# Altium PCB Macropad V2.PcbDoc (part 1 of 2)
Units mil, origin at the board's own origin, x right, y up, seen from the top; angles counter-clockwise.
Board outline 4300 x 6330 mil, 2 copper layers (Top Layer, Bottom Layer); 118 components, 85 nets, 479 pads, 180 vias.
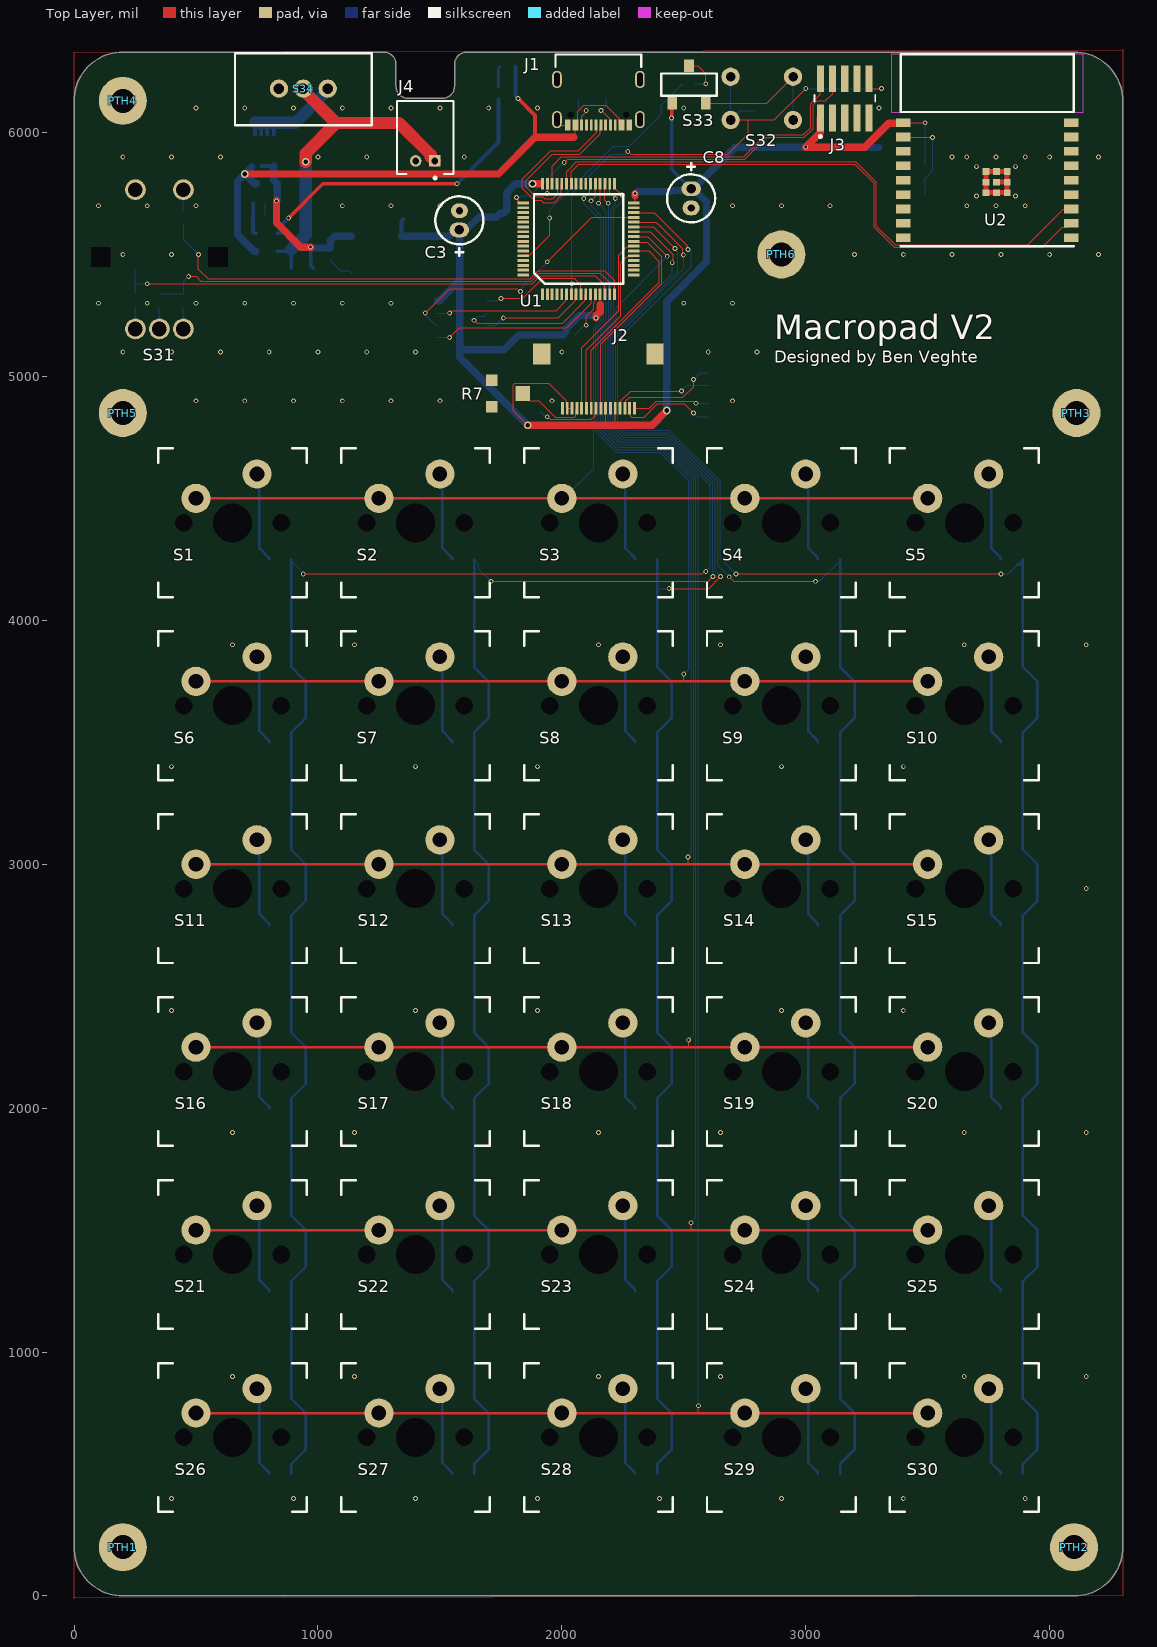
[diagram p0: Top Layer view]
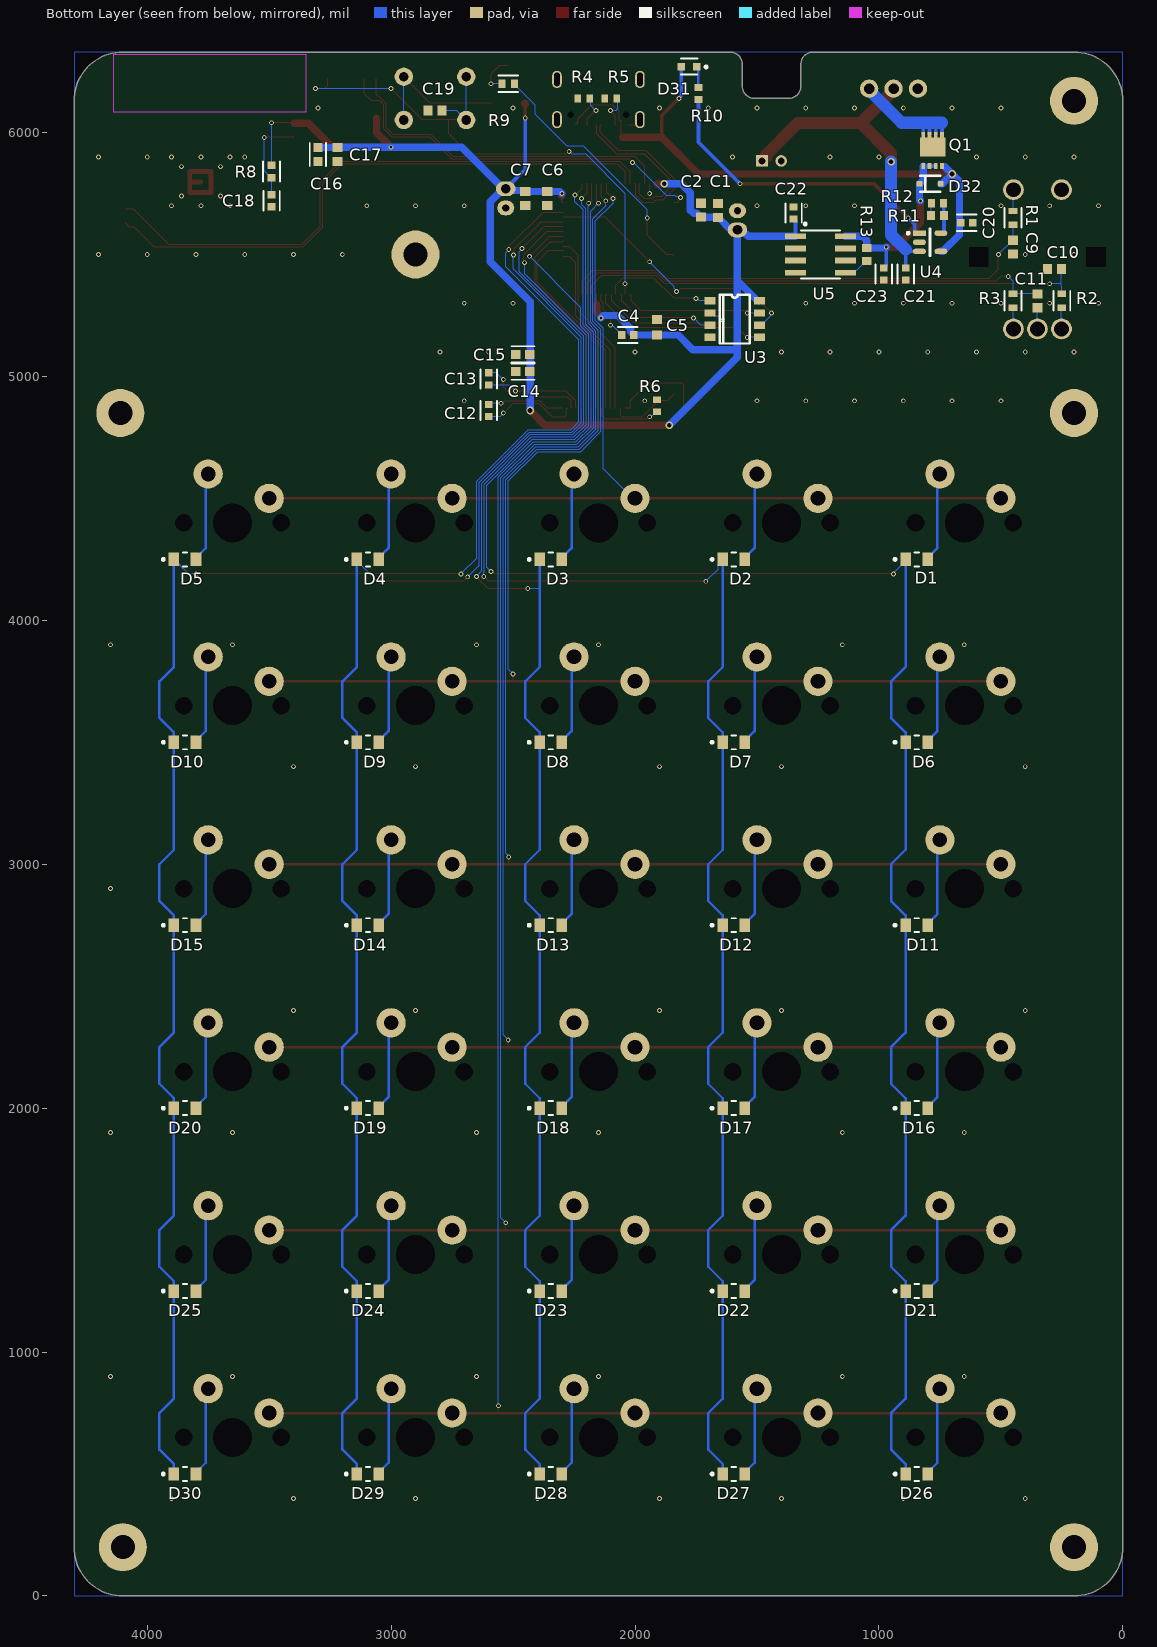
[diagram p1: Bottom Layer view, seen from below]
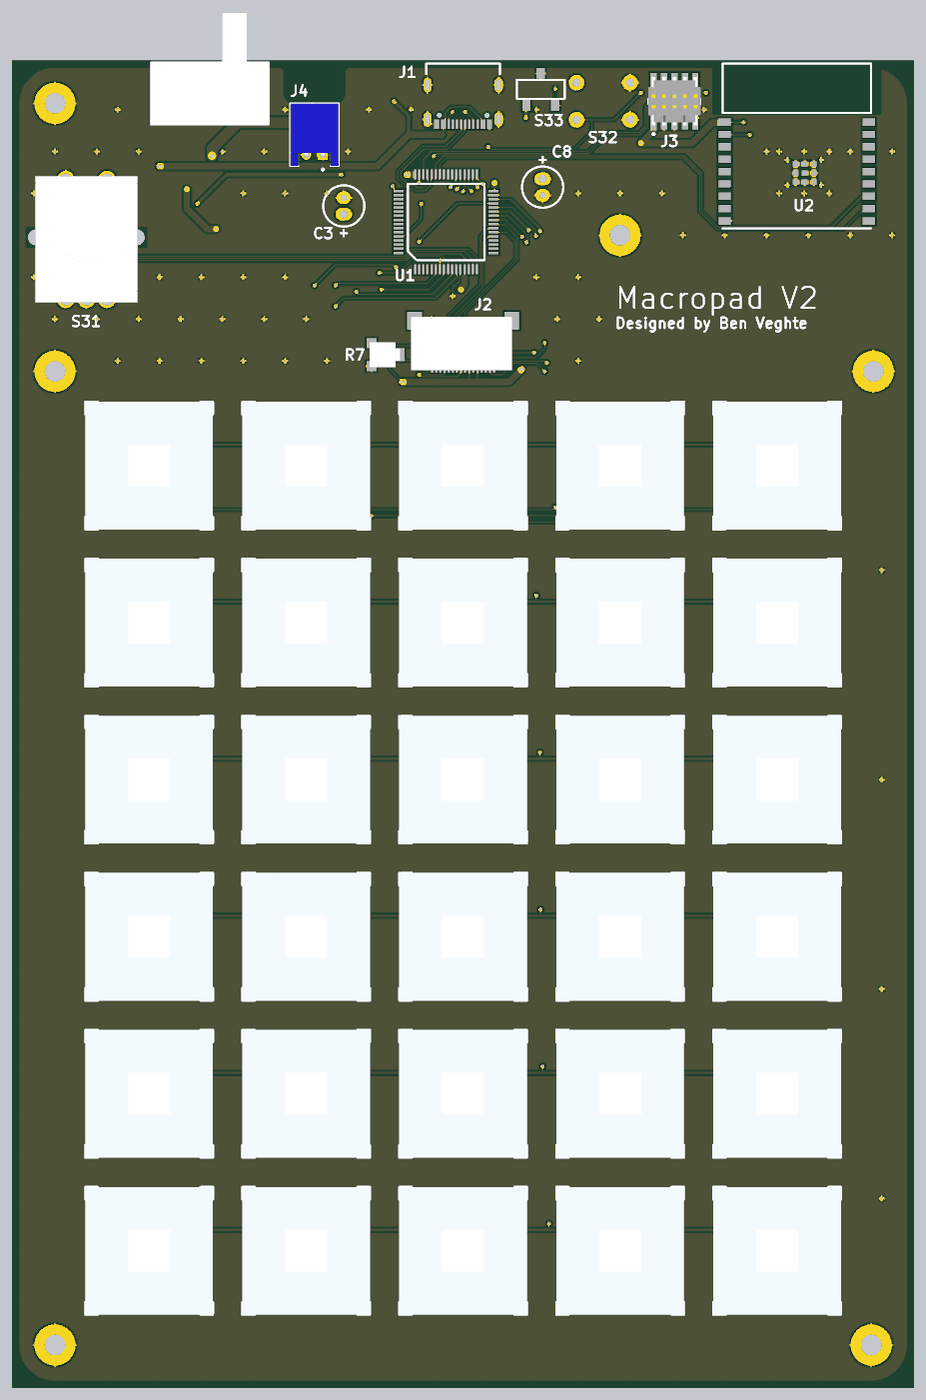
[diagram p3: 3D render of the assembled board from above, using the file's embedded part models]
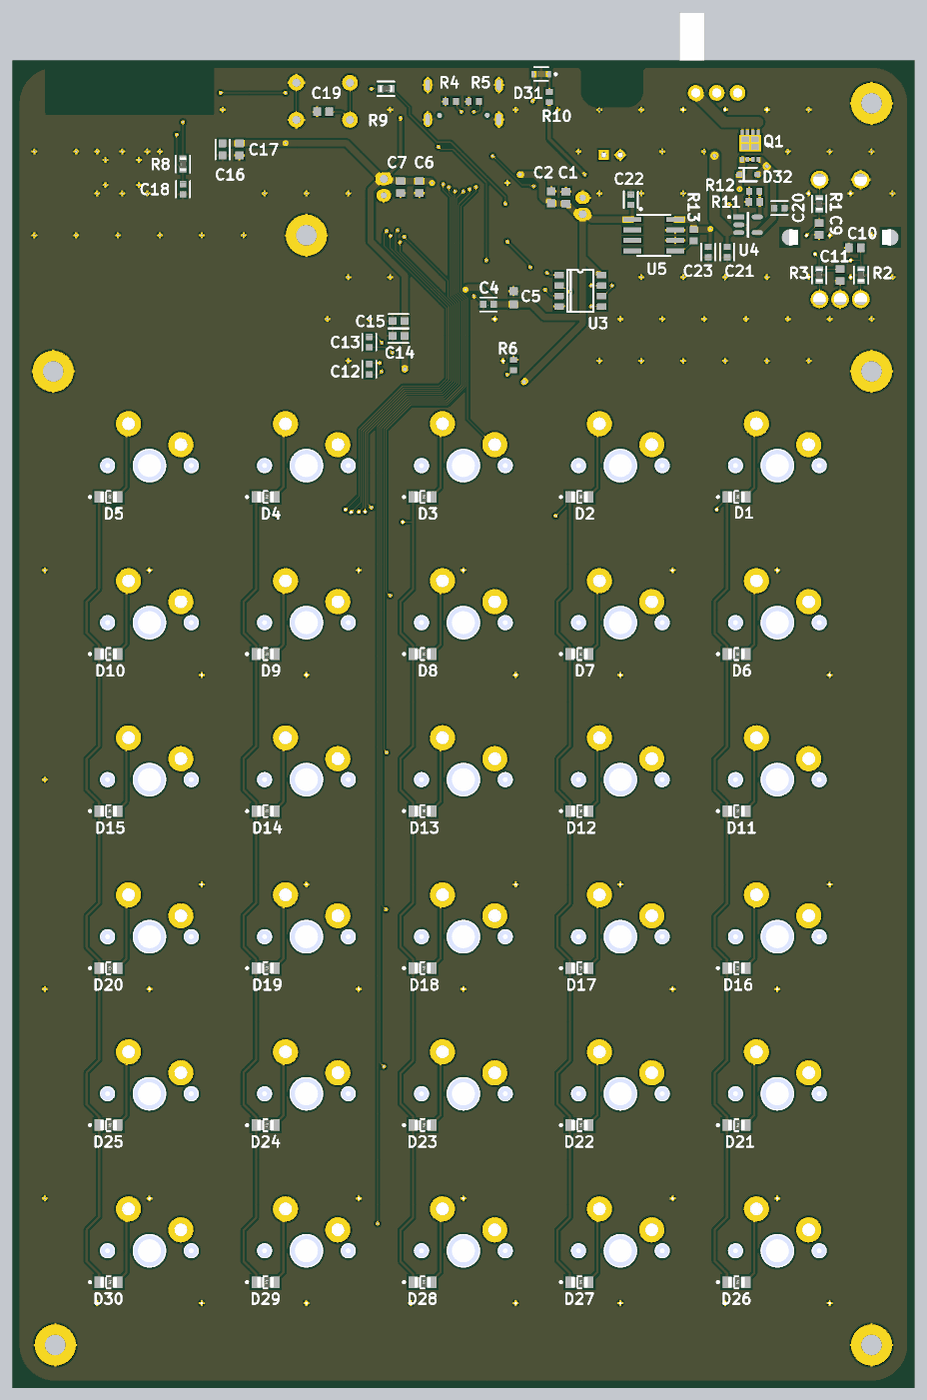
[diagram p4: 3D render of the assembled board from below, using the file's embedded part models]

## Layer stack, top to bottom
Top Solder: solder mask 0.4, Solder Resist, Dk 3.5
Top Layer: signal copper 1.4
Dielectric 1: dielectric 12.6, FR-4, Dk 4.8
Bottom Layer: signal copper 1.4
Bottom Solder: solder mask 0.4, Solder Resist, Dk 3.5

## Board outline
200,0 cw(c200,200) 0,200 0,6130 cw(c200,6130) 200,6330 1270,6330 cw(c1270,6280) 1320,6280 1320,6190 ccw(c1370,6190) 1370,6140 1510,6140 ccw(c1510,6190) 1560,6190 1560,6280 cw(c1610,6280) 1610,6330 4100,6330 cw(c4100,6130) 4300,6130 4300,200 cw(c4100,200) 4100,0

## Design rules (kind name [scope] priority, off if disabled: settings)
BoardOutlineClearance [All] p1: gap=29.53 ignorepadtopadclearanceinfootprint=FALSE
Clearance [All] p1: gap=10 ignorepadtopadclearanceinfootprint=TRUE except(0: Arc-Hole Track-Hole SMDPad-Hole THPad-Hole Via-Hole Fill-Hole Poly-Hole Region-Hole Text-Hole; 5: Arc-Arc Arc-Track Track-Track SMDPad-SMDPad; 7.87: Arc-SMDPad Track-SMDPad; 12.99: Arc-THPad Track-THPad; 19.68: THPad-THPad)
DiffPairsRouting [All] p1: maxlimit=10 minlimit=10 mostfreqgap=10 toplayer_minwidth=5 toplayer_maxwidth=15 toplayer_prefwidth=5 bottomlayer_minwidth=5 bottomlayer_maxwidth=15 bottomlayer_prefwidth=5 maxuncoupledlength=500
HoleSize [All] p1: absolutevalues=TRUE maxlimit=248.03 minlimit=7.87 maxpercent=80.000 minpercent=20.000
PolygonConnect [All] p1: connectstyle=Relief reliefconductorwidth=10 reliefentries=4 polygonreliefangle="90 Angle" airgapwidth=10
RoomDefinition "Rotary Encoder" [InComponentClass('Rotary Encoder')] p1: confinementstyle=ConfineIn formatcopy=TRUE lockcomponents=FALSE outline -1100,-1100 900,-1100 900,-100 -1100,-100
RoomDefinition "Reset Bootloader and Mounting" [InComponentClass('Reset Bootloader and Mounting')] p2: confinementstyle=ConfineIn formatcopy=TRUE lockcomponents=FALSE outline -1100,-1100 900,-1100 900,-100 -1100,-100
RoomDefinition OLED [InComponentClass('OLED')] p3: confinementstyle=ConfineIn formatcopy=TRUE lockcomponents=FALSE outline -1100,-1100 900,-1100 900,-100 -1100,-100
RoomDefinition Microcontroller [InComponentClass('Microcontroller')] p4: confinementstyle=ConfineIn formatcopy=TRUE lockcomponents=FALSE outline -1100,-1100 900,-1100 900,-100 -1100,-100
RoomDefinition "Keyboard Matrix" [InComponentClass('Keyboard Matrix')] p5: confinementstyle=ConfineIn formatcopy=TRUE lockcomponents=FALSE outline -1100,-1100 900,-1100 900,-100 -1100,-100
RoomDefinition "Flash Memory" [InComponentClass('Flash Memory')] p6: confinementstyle=ConfineIn formatcopy=TRUE lockcomponents=FALSE outline -1100,-1100 900,-1100 900,-100 -1100,-100
RoomDefinition Bluetooth [InComponentClass('Bluetooth')] p7: confinementstyle=ConfineIn formatcopy=TRUE lockcomponents=FALSE outline -1100,-1100 900,-1100 900,-100 -1100,-100
RoomDefinition "Battery Load Share V2" [InComponentClass('Battery Load Share V2')] p8: confinementstyle=ConfineIn formatcopy=TRUE lockcomponents=FALSE outline -1100,-1100 900,-1100 900,-100 -1100,-100
RoomDefinition "USB C Port" [InComponentClass('USB C Port')] p9: confinementstyle=ConfineIn formatcopy=TRUE lockcomponents=FALSE outline -1100,-1100 900,-1100 900,-100 -1100,-100
RoutingVias [All] p1: holewidth=11.81 width=19.68 viastyle="Through Hole" minholewidth=11.81 minwidth=19.68 maxholewidth=248.03 maxwidth=590.55
SolderMaskExpansion [All] p1: expansion=4 istentingtop=FALSE
Width [All] p1: maxlimit=600 minlimit=5 preferedwidth=5
28 further rules are at their usual default settings.

## Classes and differential pairs
component class "USB C Port": J1 R4 R5
component class "Rotary Encoder": C9 C10 C11 R1 R2 R3 S31
component class "Reset Bootloader and Mounting": C19 J3 PTH1 PTH2 PTH3 PTH4 PTH5 PTH6 R9 S32 S33
component class OLED: C12 C13 C14 C15 J2 R6 R7
component class Microcontroller: C1 C2 C3 C4 C5 C6 C7 C8 U1
component class "Keyboard Matrix": D1 D2 D3 D4 D5 D6 D7 D8 D9 D10 D11 D12 D13 D14 D15 D16 D17 D18 D19 D20 D21 D22 D23 D24 D25 D26 D27 D28 D29 D30 S1 S2 S3 S4 S5 S6 S7 S8 S9 S10 S11 S12 S13 S14 S15 S16 S17 S18 S19 S20 S21 S22 S23 S24 S25 S26 S27 S28 S29 S30
component class "Flash Memory": U3
component class Bluetooth: C16 C17 C18 R8 U2
component class "Battery Load Share V2": C20 C21 C22 C23 D31 D32 J4 Q1 R10 R11 R12 R13 S34 U4 U5
differential pair USB: +USB_P -USB_N

## Components (designator, comment, footprint, x,y, rotation, side; value= is the part's Value field where it differs from the comment)
C1 "CL10B104KB8NNNC" SAMS-C0603-2_M 1660,5680 r270 bottom
C2 "CL10B104KB8NNNC" SAMS-C0603-2_M 1730,5681.46 r270 bottom
C3 "860010572001" 860010572001 1580,5640 r90 top
C4 "CL10A105KA8NNNC" FP-CL10-IPC_C 2030,5170 r0 bottom
C5 "CL10B103KB8NNNC" CL10B103KB8NNNC 1910,5201.5 r270 bottom
C6 "CL10B104KB8NNNC" SAMS-C0603-2_M 2360,5730 r90 bottom
C7 "CL10B104KB8NNNC" SAMS-C0603-2_M 2450,5730 r90 bottom
C8 "860010572001" 860010572001 2530,5730 r270 top
C9 "CL10B104KB8NNNC" SAMS-C0603-2_M 450.16,5530 r270 bottom
C10 "CL10B104KB8NNNC" SAMS-C0603-2_M 280.16,5440 r0 bottom
C11 "CL10B104KB8NNNC" SAMS-C0603-2_M 350.16,5310 r90 bottom
C12 "CL10A105KA8NNNC" FP-CL10-IPC_C 2600,4860 r270 bottom
C13 "CL10A105KA8NNNC" FP-CL10-IPC_C 2600,4990 r270 bottom
C14 "CL10A106KP8NNND" FP-CL10-IPC_B 2460,5020 r0 bottom
C15 "CL10A106KP8NNND" FP-CL10-IPC_B 2460,5090 r0 bottom
C16 "CL10A106KP8NNND" FP-CL10-IPC_B 3300,5910 r90 bottom
C17 "CL10B104KB8NNNC" SAMS-C0603-2_M 3220,5910 r90 bottom
C18 "CL10A105KA8NNNC" FP-CL10-IPC_C 3490,5720 r90 bottom
C19 "CL10B104KB8NNNC" SAMS-C0603-2_M 2820,6090 r0 bottom
C20 "CL10A475KP8NNND" FP-CL10-IPC_C 640,5630 r0 bottom
C21 "CL10A475KP8NNND" FP-CL10-IPC_C 890,5420 r90 bottom
C22 "CL10A475KP8NNND" FP-CL10-IPC_C 1350,5670 r90 bottom
C23 "CL10A475KP8NNND" FP-CL10-IPC_C 980,5420 r270 bottom
D1 "TS4148 RYG" FP-TS4148_RYG-MFG 845.28,4250 r180 bottom locked
D2 "TS4148 RYG" FP-TS4148_RYG-MFG 1595.28,4250 r180 bottom locked
D3 "TS4148 RYG" FP-TS4148_RYG-MFG 2345.28,4250 r180 bottom locked
D4 "TS4148 RYG" FP-TS4148_RYG-MFG 3095.28,4250 r180 bottom locked
D5 "TS4148 RYG" FP-TS4148_RYG-MFG 3845.28,4250 r180 bottom locked
D6 "TS4148 RYG" FP-TS4148_RYG-MFG 845.28,3500 r180 bottom locked
D7 "TS4148 RYG" FP-TS4148_RYG-MFG 1595.28,3500 r180 bottom locked
D8 "TS4148 RYG" FP-TS4148_RYG-MFG 2345.28,3500 r180 bottom locked
D9 "TS4148 RYG" FP-TS4148_RYG-MFG 3095.28,3500 r180 bottom locked
D10 "TS4148 RYG" FP-TS4148_RYG-MFG 3845.28,3500 r180 bottom locked
D11 "TS4148 RYG" FP-TS4148_RYG-MFG 845.28,2750 r180 bottom locked
D12 "TS4148 RYG" FP-TS4148_RYG-MFG 1595.28,2750 r180 bottom locked
D13 "TS4148 RYG" FP-TS4148_RYG-MFG 2345.28,2750 r180 bottom locked
D14 "TS4148 RYG" FP-TS4148_RYG-MFG 3095.28,2750 r180 bottom locked
D15 "TS4148 RYG" FP-TS4148_RYG-MFG 3845.28,2750 r180 bottom locked
D16 "TS4148 RYG" FP-TS4148_RYG-MFG 845.28,2000 r180 bottom locked
D17 "TS4148 RYG" FP-TS4148_RYG-MFG 1595.28,2000 r180 bottom locked
D18 "TS4148 RYG" FP-TS4148_RYG-MFG 2345.28,2000 r180 bottom locked
D19 "TS4148 RYG" FP-TS4148_RYG-MFG 3095.28,2000 r180 bottom locked
D20 "TS4148 RYG" FP-TS4148_RYG-MFG 3845.28,2000 r180 bottom locked
D21 "TS4148 RYG" FP-TS4148_RYG-MFG 845.28,1250 r180 bottom locked
D22 "TS4148 RYG" FP-TS4148_RYG-MFG 1595.28,1250 r180 bottom locked
D23 "TS4148 RYG" FP-TS4148_RYG-MFG 2345.28,1250 r180 bottom locked
D24 "TS4148 RYG" FP-TS4148_RYG-MFG 3095.28,1250 r180 bottom locked
D25 "TS4148 RYG" FP-TS4148_RYG-MFG 3845.28,1250 r180 bottom locked
D26 "TS4148 RYG" FP-TS4148_RYG-MFG 845.28,500 r180 bottom locked
D27 "TS4148 RYG" FP-TS4148_RYG-MFG 1595.28,500 r180 bottom locked
D28 "TS4148 RYG" FP-TS4148_RYG-MFG 2345.28,500 r180 bottom locked
D29 "TS4148 RYG" FP-TS4148_RYG-MFG 3095.28,500 r180 bottom locked
D30 "TS4148 RYG" FP-TS4148_RYG-MFG 3845.28,500 r180 bottom locked
D31 "150060VS75000" FP-150060VS75000-MFG 1778.5,6270 r0 bottom
D32 "PMEG2010AEJ115" PMEG2010AEJ 790,5790 r0 bottom
J1 "USB4105-GF-A-060" USB4105-GF-A-120 2150,6320 r180 top locked
J2 "046288016000846+" 046288016000846+ 2150,5091.85 r180 top locked
J3 "FTSH-105-01-L-DV-K" SMTC-FTSH-105-01-L-DV-K_V 3160,6140 r0 top
J4 "S2B-PH-K-S(LF)(SN)" JST-S2B-PH-K-S_V 1440,5980 r180 top locked
PTH1 "PTH-M2D5X5" PTH-M2D5X5 200,200 r0 top locked
PTH2 "PTH-M2D5X5" PTH-M2D5X5 4100,200 r0 top locked
PTH3 "PTH-M2D5X5" PTH-M2D5X5 4110,4850 r0 top
PTH4 "PTH-M2D5X5" PTH-M2D5X5 200,6130 r0 top
PTH5 "PTH-M2D5X5" PTH-M2D5X5 200,4850 r0 top
PTH6 "PTH-M2D5X5" PTH-M2D5X5 2900,5500 r0 top
Q1 "PXP8R3-20QXJ" PXP8R3-20QXJ 780,5926.5 r180 bottom
R1 "ERJ-3GEYJ102V" FP-ERJ3G-MFG 450.16,5650 r270 bottom value=1000Ω
R2 "ERJ-3GEYJ102V" FP-ERJ3G-MFG 250.16,5310 r270 bottom value=1000Ω
R3 "ERJ-3GEYJ102V" FP-ERJ3G-MFG 450.16,5310 r270 bottom value=1000Ω
R4 "ERJ-3GEYJ512V" RESC1608X55X30LL15T15 2210,6140 r0 bottom
R5 "ERJ-3GEYJ512V" RESC1608X55X30LL15T15 2100,6140 r0 bottom
R6 "ERJ-3GEYJ512V" RESC1608X55X30LL15T15 1910,4880 r270 bottom
R7 "35WR100KLFTR" 35WR100KLFTR 1775.04,4930 r0 top
R8 "ERJ-3GEYJ103V" FP-ERJ3G-IPC_C 3490,5840 r90 bottom
R9 "ERJ-3GEYJ103V" FP-ERJ3G-IPC_C 2520,6200 r0 bottom
R10 "ERJ-3GEYJ101V" RESC1608X55X30LL15T15 1740,6160 r270 bottom
R11 "ERJ-3GEYJ104V" RESC1608X55X30NL15T15 760,5660 r0 bottom
R12 "ERJ-3GEYJ512V" RESC1608X55X30LL15T15 760,5710 r0 bottom
R13 "ERJ-3GEYJ104V" RESC1608X55X30NL15T15 1050,5500 r90 bottom
S1 "Cherry MX" "Cherry MX" 650,4400 r0 top locked
S2 "Cherry MX" "Cherry MX" 1400,4400 r0 top locked
S3 "Cherry MX" "Cherry MX" 2150,4400 r0 top locked
S4 "Cherry MX" "Cherry MX" 2900,4400 r0 top locked
S5 "Cherry MX" "Cherry MX" 3650,4400 r0 top locked
S6 "Cherry MX" "Cherry MX" 650,3650 r0 top locked
S7 "Cherry MX" "Cherry MX" 1400,3650 r0 top locked
S8 "Cherry MX" "Cherry MX" 2150,3650 r0 top locked
S9 "Cherry MX" "Cherry MX" 2900,3650 r0 top locked
S10 "Cherry MX" "Cherry MX" 3650,3650 r0 top locked
S11 "Cherry MX" "Cherry MX" 650,2900 r0 top locked
S12 "Cherry MX" "Cherry MX" 1400,2900 r0 top locked
S13 "Cherry MX" "Cherry MX" 2150,2900 r0 top locked
S14 "Cherry MX" "Cherry MX" 2900,2900 r0 top locked
S15 "Cherry MX" "Cherry MX" 3650,2900 r0 top locked
S16 "Cherry MX" "Cherry MX" 650,2150 r0 top locked
S17 "Cherry MX" "Cherry MX" 1400,2150 r0 top locked
S18 "Cherry MX" "Cherry MX" 2150,2150 r0 top locked
S19 "Cherry MX" "Cherry MX" 2900,2150 r0 top locked
S20 "Cherry MX" "Cherry MX" 3650,2150 r0 top locked
S21 "Cherry MX" "Cherry MX" 650,1400 r0 top locked
S22 "Cherry MX" "Cherry MX" 1400,1400 r0 top locked
S23 "Cherry MX" "Cherry MX" 2150,1400 r0 top locked
S24 "Cherry MX" "Cherry MX" 2900,1400 r0 top locked
S25 "Cherry MX" "Cherry MX" 3650,1400 r0 top locked
S26 "Cherry MX" "Cherry MX" 650,650 r0 top locked
S27 "Cherry MX" "Cherry MX" 1400,650 r0 top locked
S28 "Cherry MX" "Cherry MX" 2150,650 r0 top locked
S29 "Cherry MX" "Cherry MX" 2900,650 r0 top locked
S30 "Cherry MX" "Cherry MX" 3650,650 r0 top locked
S31 "EN12-HS22AF30" EN12-HS22AF30 350,5490 r0 top
S32 "TS02-66-43-BK-100-SCR-D" TS02-66-43-BK-100-SCR-D 2820,6140 r0 top
S33 "CJS-1200B1" CJS-1200B1 2521.1,6196.77 r0 top
S34 "25336NA6" 25336NA6 940,6180 r270 top
U1 "STM32F072RBT7" STM32F072RBT6 1920.95,5337.24 r90 top
U2 "ESP32-C3-WROOM-02-N4" ESP32-C3-WROOM-02-N4 3744.49,5532.91 r0 top locked
U3 "IS25LQ020B-JNLE" IS25LQ020B-JNLE 1692.5,5310 r180 bottom
U4 "MCP73831T-2ACI/OT" FP-C04-091-OT-IPC_B 790,5550 r180 bottom
U5 "AP2115M-3.3TRG1" AP2115M-3.3TRG1 1240,5500 r180 bottom

## Footprints (in the part's own frame and the unit in brackets; to place one, negate y for a bottom-side part, rotate by r counter-clockwise, add the part's x,y. Pads: shape width x height; smd on the part's side, far side on the other; paste and mask are expansions set on the pad)
35WR100KLFTR [mm]
  rect 1.2x1.2 smd: 1(-1.6,1.4) 3(-1.6,-1.4)
  rect 1.5x1.6 smd: 2(1.65,0)
  body extent -1.8,-1.5 1.85,1.5, height 1.8
25336NA6 [mm]
  round 1.905 hole 1.1: 1(0,2.54) 2(0,0) 3(0,-2.54)
  silkscreen extent -3.68,-7.11 3.82,7.11, body extent -9.75,-7.05 3.75,7.05, height 8.1
860010572001 [mil]
  oval 60x70 hole 30: 0(39.37,0)
  oval 60x80 hole 39.37: 1(-39.37,0)
  silkscreen extent -145,-98 98,98
046288016000846+ [mm]
  rect 0.3x1.3 smd: 1(-3.75,5.65) 2(-3.25,5.65) 3(-2.75,5.65) 4(-2.25,5.65) 5(-1.75,5.65) 6(-1.25,5.65) 7(-0.75,5.65) 8(-0.25,5.65) 9(0.25,5.65) 10(0.75,5.65) 11(1.25,5.65) 12(1.75,5.65) 13(2.25,5.65) 14(2.75,5.65) 15(3.25,5.65) 16(3.75,5.65)
  rect 1.8x2.2 smd: GND(-5.9,0) GND(5.9,0)
  body extent -5.9,-0.5 6.3,6, height 2
AP2115M-3.3TRG1 [mm]
  rect 2.2x0.6 smd: 1(-2.6,1.905) 2(-2.6,0.635) 3(-2.6,-0.635) 4(-2.6,-1.905) 5(2.6,-1.905) 6(2.6,-0.635) 7(2.6,0.635) 8(2.6,1.905)
  silkscreen extent -2,-2.5 2,3.3
"Cherry MX" [mil]
  round 120 hole 60: 0(-150,100) 1(100,200)
  round 0 hole 160 unplated: 3(0,0)
  round 0 hole 72 unplated: 4(200,0) 5(-200,0)
  silkscreen extent -305,-305 305,305, body extent -305,-305 305,305, height 555
CJS-1200B1 [mm]
  rect 1x1.3 smd: 1(-1.75,-1.95) 2(0,1.95) 3(1.75,-1.95)
  silkscreen extent -2.9,-1.15 2.9,1.15
CL10B103KB8NNNC [mm]
  rect 0.95x1 smd: 1(0.8,0) 2(-0.8,0)
EN12-HS22AF30 [mil] "Rotary Encoder"
  round 85 hole 60: 0(-98.43,275.59) 1(98.43,275.59) A(-98.43,-295.28) B(98.43,-295.28) C(0,-295.28)
  round 0 hole 78.74 square unplated: 7(-240.16,0) 7(240.16,0)
  body extent -244,-311 244,291, height 1181
ESP32-C3-WROOM-02-N4 [mm]
  rect 1.5x0.9 smd: 1(-8.75,12.9) 2(-8.75,11.4) 3(-8.75,9.9) 4(-8.75,8.4) 5(-8.75,6.9) 6(-8.75,5.4) 7(-8.75,3.9) 8(-8.75,2.4) 9(-8.75,0.9) 10(8.75,0.9) 11(8.75,2.4) 12(8.75,3.9) 13(8.75,5.4) 14(8.75,6.9) 15(8.75,8.4) 16(8.75,9.9) 17(8.75,11.4) 18(8.75,12.9)
  rect 0.7x0.7 smd: 19(-0.14,5.6) 19(-0.14,6.7) 19(-0.14,7.8) 19(0.96,5.6) 19(0.96,6.7) 19(0.96,7.8) 19(2.06,5.6) 19(2.06,6.7) 19(2.06,7.8)
  Keep-Out Layer region: -10,20 -10,14 10,14 10,20
  silkscreen extent -9,0 9,20
FP-150060VS75000-MFG [mm]
  rect 0.8x0.8 smd paste+0 mask+0: 1(-0.8,0) 2(0.8,0)
  silkscreen extent -1.9,-0.83 0.85,0.82, body extent -0.8,-0.4 0.8,0.4, height 0.8
FP-C04-091-OT-IPC_B [mm]
  rect 1.338x0.578 smd paste+0 mask+0: 1(-1.116,0.95)
  rrect100% 1.338x0.578 smd paste+0 mask+0: 2(-1.116,0) 3(-1.116,-0.95) 4(1.116,-0.95) 5(1.116,0.95)
  silkscreen extent -2.41,-1.45 0.05,1.45
FP-CL10-IPC_B [mil]
  rect 37.72x35.91 smd paste+0 mask+0: 1(-28.62,0) 2(28.62,0)
  silkscreen extent -47,-34 47,34, body extent -31,-16 31,16, height 36
FP-CL10-IPC_C [mil]
  rect 29.85x31.97 smd paste+0 mask+0: 1(-24.68,0) 2(24.68,0)
  silkscreen extent -40,-33 40,33, body extent -31,-16 31,16, height 36
FP-ERJ3G-IPC_C [mil]
  rect 29.78x33.94 smd paste+0 mask+0: 1(-25.62,0) 2(25.62,0)
  silkscreen extent -41,-34 41,34, body extent -31,-16 31,16, height 22
FP-ERJ3G-MFG [mm]
  rect 0.65x0.9 smd paste+0 mask+0: 1(-0.725,0) 2(0.725,0)
  silkscreen extent -1.03,-0.87 1.03,0.87, body extent -0.8,-0.4 0.8,0.4, height 0.55
FP-TS4148_RYG-MFG [mm]
  rect 1.1x1.4 smd paste+0 mask+0: 1(-1.15,0) 2(1.15,0)
  silkscreen extent -2.38,-0.72 0.23,0.72, body extent -1,-0.63 1,0.63, height 0.85
IS25LQ020B-JNLE [mil]
  rect 45x30 smd: 1(0,0) 2(0,-50) 3(0,-100) 4(0,-150) 5(202.5,-150) 6(202.5,-100) 7(202.5,-50) 8(202.5,0)
  silkscreen extent 40,-175 162,25
JST-S2B-PH-K-S_V [mm] "THD, 2-Leads, Body 7.6x5.9mm, Pitch 2mm"
  rect 1.2x1.2 hole 0.7: 1(-1,2.45)
  round 1.2 hole 0.7: 2(1,2.45)
  silkscreen extent -2.95,-3.8 2.95,4.35, body extent -2.95,-3.8 2.95,3.8, height 4.8
PMEG2010AEJ [mm]
  rect 0.6x0.6 smd: 1(1.1,0) 2(-1.1,0)
  silkscreen extent -1.05,-0.82 1.05,0.82
PTH-M2D5X5 [mm]
  round 5 hole 2.5: 1(0,0)
PXP8R3-20QXJ [mm]
  rect 0.4x0.6 smd: 1(-0.975,-1.625) 2(-0.325,-1.625) 3(0.325,-1.625) 4(0.975,-1.625) 5(0.975,1.625) 6(0.325,1.625) 7(-0.325,1.625) 8(-0.975,1.625)
  rect 2.65x1.98 smd paste-2539.97: 9(0,0.343)
RESC1608X55X30LL15T15 [mm] "Chip Resistor, 2-Leads, Body 1.60x0.80mm, IPC High Density"
  rect 0.7x0.85 smd: 1(-0.625,0) 2(0.625,0)
  body extent -0.87,-0.48 0.87,0.48, height 0.55
RESC1608X55X30NL15T15 [mm] "Chip Resistor, 2-Leads, Body 1.60x0.80mm, IPC Medium Density"
  rect 0.8x0.95 smd: 1(-0.675,0) 2(0.675,0)
  body extent -0.87,-0.48 0.87,0.48, height 0.55
SAMS-C0603-2_M [mm] "Chip Capacitor, 2-Leads, Body 1.70x0.90mm, IPC Low Density"
  rect 0.95x1.05 smd: 1(-0.725,0) 2(0.725,0)
  body extent -0.85,-0.45 0.85,0.45, height 0.9
SMTC-FTSH-105-01-L-DV-K_V [mm] "CONN, 10-Leads, Body 6.35x3.43mm, Pitch 1.27mm"
  rect 0.74x2.79 smd: 1(-2.54,-2.035) 2(-2.54,2.035) 3(-1.27,-2.035) 4(-1.27,2.035) 5(0,-2.035) 6(0,2.035) 7(1.27,-2.035) 8(1.27,2.035) 9(2.54,-2.035) 10(2.54,2.035)
  silkscreen extent -3.17,-4.1 3.17,0.34, body extent -3.17,-2.92 3.18,2.92, height 6.12
STM32F072RBT6 [mm]
  rect 1.2x0.3 smd: 1(0,0) 2(0,-0.5) 3(0,-1) 4(0,-1.5) 5(0,-2) 6(0,-2.5) 7(0,-3) 8(0,-3.5) 9(0,-4) 10(0,-4.5) 11(0,-5) 12(0,-5.5) 13(0,-6) 14(0,-6.5) 15(0,-7) 16(0,-7.5) 33(11.5,-7.5) 34(11.5,-7) 35(11.5,-6.5) 36(11.5,-6) 37(11.5,-5.5) 38(11.5,-5) 39(11.5,-4.5) 40(11.5,-4) 41(11.5,-3.5) 42(11.5,-3) 43(11.5,-2.5) 44(11.5,-2) 45(11.5,-1.5) 46(11.5,-1) 47(11.5,-0.5) 48(11.5,0)
  rect 0.3x1.2 smd: 17(2,-9.5) 18(2.5,-9.5) 19(3,-9.5) 20(3.5,-9.5) 21(4,-9.5) 22(4.5,-9.5) 23(5,-9.5) 24(5.5,-9.5) 25(6,-9.5) 26(6.5,-9.5) 27(7,-9.5) 28(7.5,-9.5) 29(8,-9.5) 30(8.5,-9.5) 31(9,-9.5) 32(9.5,-9.5) 49(9.5,2) 50(9,2) 51(8.5,2) 52(8,2) 53(7.5,2) 54(7,2) 55(6.5,2) 56(6,2) 57(5.5,2) 58(5,2) 59(4.5,2) 60(4,2) 61(3.5,2) 62(3,2) 63(2.5,2) 64(2,2)
  silkscreen extent 1.11,-8.39 10.39,0.89
TS02-66-43-BK-100-SCR-D [mm]
  round 1.905 hole 1: 1(-3.25,2.25) 2(3.25,2.25) 3(-3.25,-2.25) 4(3.25,-2.25)
USB4105-GF-A-120 [mm]
  round 0 hole 0.65 unplated: 32(-2.89,6.28) 33(2.89,6.28)
  rect 0.6x1.15 smd: A1/B12(-3.2,7.355) A4/B9(-2.4,7.355) B1/A12(3.2,7.355) B4/A9(2.4,7.355)
  rect 0.3x1.15 smd: A5(-1.25,7.355) A6(-0.25,7.355) A7(0.25,7.355) A8(1.25,7.355) B5(1.75,7.355) B6(0.75,7.355) B7(-0.75,7.355) B8(-1.75,7.355)
  oval 1x1.8 hole 0.6 slot 1.4 at 90 deg: MNT1(-4.32,6.78) MNT2(-4.32,2.6) MNT3(4.32,2.6) MNT4(4.32,6.78)
  silkscreen extent -4.47,0 4.47,1.27

## Part data
C1 C2 C6 C7 C9 C10 C11 C17 C19: library part CMP-2000-05332-1, "Multi-layer Ceramic Capacitor, -55 to 125 degC, 2-Pin SMD (0603), RoHS, Tape and Reel", Capacitance=0.1µF, Case Size/Dimension=0603, Dielectric=X7R, Manufacturer="Samsung Electro-Mechanics", Rated Voltage=50V, Tolerance (%)=±10%, Datasheet URL=https://datasheet.ciiva.com/29198/456651-da-01-en-vs-kondensator-0605-29198839.pdf, Datasheet Version=Nov-10, Manufacturer URL=http://www.samsungsem.com/global/index.jsp
C3 C8: "Aluminium Electrolytic Capacitor, Wcap-Atg8 Series, 4.7 F, 20%, 35 V, 5 Mm, Radial Leaded Rohs Compliant: Yes", Capacitance=4.7uF, Case/Package=Radial, Manufacturer="Wurth Electronics", Max Operating Temperature=85°C, Min Operating Temperature=-40°C, Package Quantity=2000, Ripple Current=44mA, Supplier Part Number 1=8397295, Tolerance=20%, Voltage Rating=35V, Category="Aluminum Electrolytic Capacitors", ComponentLink1Description=http://www.farnell.com/datasheets/1879541.pdf?src-supplier=Farnell, ComponentLink1URL=http://www.farnell.com/datasheets/1879541.pdf?src-supplier=Farnell, ComponentLink2Description=http://www.farnell.com/datasheets/1879541.pdf?src-supplier=Element14, ComponentLink2URL=http://www.farnell.com/datasheets/1879541.pdf?src-supplier=Element14, ComponentLink3Description=https://katalog.we-online.de/pbs/datasheet/860010572001.pdf?src-supplier=Digi-Key, ComponentLink3URL=https://katalog.we-online.de/pbs/datasheet/860010572001.pdf?src-supplier=Digi-Key, ComponentLink4Description=http://katalog.we-online.de/pbs/datasheet/860010572001.pdf?src-supplier=Digi-Key, ComponentLink4URL=http://katalog.we-online.de/pbs/datasheet/860010572001.pdf?src-supplier=Digi-Key, Diameter=5mm, Height=11mm, Height - Seated (Max)=0.492inch, Lead Pitch=0.079inch, Life (Hours)=2000Hour, Manufacturer Part Number=860010572001, Mount="Through Hole", Packaging="Tape and Reel", Polarity=Polar, Pricing 1="50=0.09100, 250=0.06400, 500=0.05100, 1000=0.04900 (USD)", REACH SVHC=Unknown, RoHS=Yes, RoHS Compliant=Yes, Stock 1=1, Supplier 1=RSComponents, Voltage Rating (DC)=35V
C4 C12 C13 C18: library part CMP-13271-004127-1, "Cap Ceramic 1uF 25V X5R ±10% Pad SMD 0603 +85°C T/R", Capacitance=1uF, Case Code (Imperial)=0603, Case Code (Metric)=1608, Dielectric=X5R, Max Operating Temperature=85°C, Min Operating Temperature=-55°C, Package Quantity=1, Tolerance=10%, Voltage=25V, Case/Package=0603, Contact Plating=Tin, Depth=0.8mm, Height=0.8mm, Lead Free="Lead Free", Length=1.6mm, Material=Ceramic, Mount="Surface Mount", Packaging="Tape and Reel", Radiation Hardening=No, Thickness=0.035inch, Voltage Rating=25V, Voltage Rating (DC)=25V, Width=0.031inch
C5: "CAP CER 10000PF 50V X7R 0603", Capacitance=10nF, Case Code (Imperial)=0603, Case Code (Metric)=1608, Dielectric=X7R, Manufacturer=Samsung, Max Operating Temperature=125°C, Min Operating Temperature=-55°C, Package Quantity=1, Tolerance=10%, Voltage=50V, Case/Package=0603, Category="Ceramic Capacitors", ComponentLink1Description=https://datasheet.ciiva.com/15195/getdatasheetpartid-357415-15195721.pdf?src-supplier=Verical, ComponentLink1URL=https://datasheet.ciiva.com/15195/getdatasheetpartid-357415-15195721.pdf?src-supplier=Verical, ComponentLink2Description=https://datasheet.ciiva.com/29198/457455-da-01-en-vs-kondensator-0603-29198644.pdf?src-supplier=Conrad, ComponentLink2URL=https://datasheet.ciiva.com/29198/457455-da-01-en-vs-kondensator-0603-29198644.pdf?src-supplier=Conrad, Construction=Flat, Contact Plating=Tin, Depth=0.8mm, Height=0.8mm, Lead Free="Lead Free", Length=1.6mm, Manufacturer Part Number=CL10B103KB8NNNC, Material=Ceramic, Mount="Surface Mount", Packaging="Tape and Reel", Pricing 1="4000=0.00480, 8000=0.00470, 12000=0.00440, 40000=0.00350 (USD)", Radiation Hardening=No, RoHS=Yes, RoHS Compliant=Yes, Series=CL, Stock 1=4784000, Supplier 1="Arrow Electronics", Supplier Part Number 1=CL10B103KB8NNNC, Thickness=0.035inch, Voltage Rating=50V, Voltage Rating (DC)=50V, Width=0.031inch
C14 C15 C16: library part CMP-13271-003245-1, "Cap Ceramic 10uF 10V X5R ±10% Pad SMD 0603 +85°C T/R", Capacitance=10uF, Case/Package=0603, Dielectric=X5R, Max Operating Temperature=85°C, Min Operating Temperature=-55°C, Package Quantity=10000, Tolerance=10%, Voltage Rating=10V, Depth=0.8mm, Height=0.8mm, Lead Free="Lead Free", Length=1.6mm, Mount="Surface Mount", Packaging="Tape and Reel", Radiation Hardening=No, Thickness=0.035inch, Voltage Rating (DC)=10V, Width=0.031inch
C20 C21 C22 C23: library part CMP-13271-003065-1, "Cap Ceramic 4.7uF 10V X5R ±10% Pad SMD 0603 +85°C T/R", Capacitance=4.7uF, Case/Package=0603, Dielectric=X5R, Max Operating Temperature=85°C, Min Operating Temperature=-55°C, Package Quantity=10000, Tolerance=10%, Voltage Rating=10V, Depth=0.8mm, Height=0.8mm, Length=1.6mm, Mount="Surface Mount", Packaging="Tape and Reel", Radiation Hardening=No, Thickness=0.035inch, Voltage Rating (DC)=10V, Width=0.031inch
D1 D2 D3 D4 D5 D6 D7 D8 D9 D10 D11 D12 D13 D14 D15 D16 D17 D18 D19 D20 D21 D22 D23 D24 D25 D26 D27 D28 D29 D30: library part CMP-15605-000006-1, "Rectifier Diode Switching 75V 0.15A 4ns 2-Pin Case 0805(2012Metric) T/R", Case/Package=SMD/SMT, Forward Voltage=1V, Max Forward Surge Current (Ifsm)=2A, Max Operating Temperature=175°C, Max Repetitive Reverse Voltage (Vrrm)=75V, Min Operating Temperature=-65°C, Element Configuration=Single, Mount="Surface Mount", Number of Pins=2, Packaging="Tape and Reel", Peak Non-Repetitive Surge Current=2A, Radiation Hardening=No, Reverse Recovery Time=4ns, RoHS Compliant=Yes
D31: library part CMP-1426-00006-5, "LED GREEN CLEAR 0603 SMD", Case Code (Imperial)=0603, Case Code (Metric)=1608, Color=Green, Forward Current=20mA, Forward Voltage=2V, Lens Color=Colorless, Max Operating Temperature=85°C, Min Operating Temperature=-40°C, Package Quantity=4000, Power Rating=72mW, Reverse Voltage (DC)=5V, Case/Package=0603, Dominant Wavelength=570nm, Height=0.8mm, Illumination Color=Green, Length=1.6mm, Lens Size=0.7mm, Lens Style=Rectangular, Lens Transparency=Clear, Luminous Intensity=40mcd, Mount="Surface Mount", Number of Pins=2, Packaging="Cut Tape", RoHS Compliant=Yes, Series=WL-SMCW, Test Current=20mA, Viewing Angle=140°, Wavelength=570nm, Weight=0.000882oz, Width=0.8mm
D32: "NXP         PMEG2010AEJ,115             Schottky Rectifier, Single, 20 V, 1 A, SOD-323F, 2 Pins, 550 mV", Average Rectified Current=1A, Forward Voltage=550mV, Manufacturer="NXP Semiconductors", Max Forward Surge Current (Ifsm)=10A, Max Operating Temperature=150°C, Max Repetitive Reverse Voltage (Vrrm)=20V, Max Reverse Current=70uA, Min Operating Temperature=-65°C, Package Quantity=1, Supplier Part Number 1=568-4113-1-ND, Category="Schottky Diodes", ComponentLink1Description=https://datasheet.ciiva.com/28648/666247-28648370.pdf?src-supplier=Element14, ComponentLink1URL=https://datasheet.ciiva.com/28648/666247-28648370.pdf?src-supplier=Element14, ComponentLink2Description=https://datasheet.ciiva.com/913/pmeg2010aej-913523.pdf?src-supplier=Digi-Key, ComponentLink2URL=https://datasheet.ciiva.com/913/pmeg2010aej-913523.pdf?src-supplier=Digi-Key, ComponentLink3Description=https://datasheet.ciiva.com/4714/pmeg2010aej-117858-4714480.pdf?src-supplier=Mouser, ComponentLink3URL=https://datasheet.ciiva.com/4714/pmeg2010aej-117858-4714480.pdf?src-supplier=Mouser, ComponentLink4Description=https://datasheet.ciiva.com/7965/666247-7965049.pdf?src-supplier=Element14, ComponentLink4URL=https://datasheet.ciiva.com/7965/666247-7965049.pdf?src-supplier=Element14, ComponentLink5Description=https://datasheet.ciiva.com/31423/666247-31423031.pdf?src-supplier=Farnell, ComponentLink5URL=https://datasheet.ciiva.com/31423/666247-31423031.pdf?src-supplier=Farnell, ComponentLink6Description=https://datasheet.ciiva.com/913/pmeg2010aej-913524.pdf?src-supplier=Digi-Key, ComponentLink6URL=https://datasheet.ciiva.com/913/pmeg2010aej-913524.pdf?src-supplier=Digi-Key, ComponentLink7Description=https://datasheet.ciiva.com/913/pmeg2010aej-913525.pdf?src-supplier=Digi-Key, ComponentLink7URL=https://datasheet.ciiva.com/913/pmeg2010aej-913525.pdf?src-supplier=Digi-Key, Element Configuration=Single, Forward Current=1A, Height=0.25inch, Lead Free="Lead Free", Length=0.25inch, Manufacturer Part Number=PMEG2010AEJ115, Max Reverse Leakage Current=70uA, Max Reverse Voltage (DC)=20V, Max Surge Current=10A, Mount="Surface Mount", Number of Pins=2, Packaging="Tape and Reel", Peak Non-Repetitive Surge Current=10A, Radiation Hardening=No, REACH SVHC="No SVHC", RoHS=Yes, Supplier 1=Digi-Key, Termination=SMD/SMT, Weight=0.01lb, Width=0.25inch
J1: "USB CONN, 2.0 TYPE C, RCPT, 16POS, SMT; USB Connector Type: USB Type C; USB Standard: USB 2.0; Gender: Receptacle;...", Manufacturer="Global Connector Technology", Supplier Part Number 1=60AJ4630, Category=Connectors, Manufacturer Part Number=USB4105-GF-A-060, Pricing 1="1=0.93700, 100=0.74000, 250=0.67600, 500=0.61600, 800=0.61600, 1000=0.57400 (USD)", RoHS=Yes, Stock 1=1600, Supplier 1=Newark
J2: "Conn FFC/FPC Connector SKT 16 POS 0.5mm Solder RA SMD Automotive T/R", Current Rating=400mA, Manufacturer="Kyocera AVX", Max Operating Temperature=105°C, Min Operating Temperature=-40°C, Package Quantity=1, Supplier Part Number 1=581-046288016000846+, Voltage Rating=50V, Category="FFC / FPC", ComponentLink1Description=https://datasheet.ciiva.com/10366/6288-10366323.pdf?src-supplier=Avnet, ComponentLink1URL=https://datasheet.ciiva.com/10366/6288-10366323.pdf?src-supplier=Avnet, ComponentLink2Description=https://datasheet.ciiva.com/18454/70107521-18454565.pdf?src-supplier=Allied+Electronics, ComponentLink2URL=https://datasheet.ciiva.com/18454/70107521-18454565.pdf?src-supplier=Allied+Electronics, ComponentLink3Description=https://datasheet.ciiva.com/671/6288-671255.pdf?src-supplier=Digi-Key, ComponentLink3URL=https://datasheet.ciiva.com/671/6288-671255.pdf?src-supplier=Digi-Key, ComponentLink4Description=https://datasheet.ciiva.com/16327/6288-16327495.pdf?src-supplier=Future+Electronics, ComponentLink4URL=https://datasheet.ciiva.com/16327/6288-16327495.pdf?src-supplier=Future+Electronics, ComponentLink5Description=https://datasheet.ciiva.com/671/6288-671256.pdf?src-supplier=Digi-Key, ComponentLink5URL=https://datasheet.ciiva.com/671/6288-671256.pdf?src-supplier=Digi-Key, ComponentLink6Description=https://datasheet.ciiva.com/671/6288-671257.pdf?src-supplier=Digi-Key, ComponentLink6URL=https://datasheet.ciiva.com/671/6288-671257.pdf?src-supplier=Digi-Key, Contact Location=Bottom, Contact Material="Copper Alloy", Contact Plating=Gold, Gender=Male, Housing Material=Plastic, Lead Free="Lead Free", Manufacturer Part Number=046288016000846+, Mount="Surface Mount", Number of Contacts=16, Number of Positions=16, Number of Rows=1, Orientation="Right Angle", Packaging="Tape and Reel", Pitch=0.5mm, Pricing 1="1=1.38000, 10=1.22000, 50=1.22000, 100=1.05000, 200=0.95100, 500=0.85600, 1000=0.76100, 2000=0.62700, 4000=0.61800, 10000=0.61800 (USD)", Radiation Hardening=No, RoHS=Yes, Series=6288, Stock 1=2627, Supplier 1=Mouser, Termination=Solder
J3: library part CMP-2000-05353-1, "Male Header, Pitch 1.27 mm, 2 x 5 Position, Height 6.25 mm", Color=Black, Manufacturer=Samtec, Package Description="Male Header, Pitch 1.27 mm, 2 x 5 Position, Height 5.97 mm, Tail Length 4.32 mm", Standard Package=1, Category=Connectors,Interconnects, Connector Type=Header,Unshrouded, Contact Finish=Gold, Contact Finish Thickness=10µin(0.25µm), Contact Mating Length="0.120\"(3.05mm)", Contact Type=MalePin, Datasheet URL=http://suddendocs.samtec.com/prints/ftsh-1xx-xx-xxx-dv-xxx-mkt.pdf, Datasheet Version="Rev. ET, 10/1995", Family=RectangularConnectors-Headers,MalePins, Manufacturer URL=http://www.samtec.com/, Mating Products="SFMC-105-L2-S-D-TR-ND / -CONN.05\"SURFACE10POSSMT / FLE-105-01-G-DV-TR-ND / -CONNSKT1.27MM10POSDUALSMD / FLE-105-01-G-DV-A-P-ND / -CONNSKT1.27MM10POSDUALSMD / FLE-105-01-G-DV-A-ND / -CONNSKT1.27MM10POSDUALSMD / CLP-105-02-G-D-P-TR-ND / -CONNRCPT10POSDUAL.05\"SMD / SAM1155-05-ND / -CONNRCPT10POSDUAL.05\"SMD / SAM1154-05-ND / -CONNRCPT10POSDUAL.05\"SMD / SAM1153-05-ND / -CONNRCPT10POSDUAL.05\"SMD / SAM1226-05-ND / -CONNRCPT.05\"10POSDUALSMD", Mounting Type=SurfaceMount, Number of Positions=10, Number of Positions Loaded=All, Number of Rows=2, Other Names=Q3937619, Package Reference=FTSH-105-01-L-DV-K, Package URL=http://suddendocs.samtec.com/prints/ftsh-1xx-xx-xxx-dv-xxx-footprint.pdf, Packaging=Tube, Pitch="0.050\"(1.27mm)", Product Training Modules=Board-to-BoardConnectors, Row Spacing="0.050\"(1.27mm)", Series=FTSH, Termination=Solder
J4: library part CMP-1755-00004-1, "Male Header, Pitch 2 mm, 1 x 2 Position, Height 4.8 mm, Tail Length 3.4 mm, -25 to 85 degC, RoHS, Bulk", Capacitance="10 uF", Case\Package=Radial, Max Operating Temperature="85 degC", Min Operating Temperature="-40 degC", Package Quantity=200, Tolerance=20%, Voltage Rating="50 V", ComponentLink1Description=Datasheet, ComponentLink1URL=http://www.jst-mfg.com/product/pdf/eng/ePH.pdf, DatasheetVersion=Dec-12, Diameter="5 mm", Height="11 mm", Lead Pitch="2 mm", Length="11 mm", Mount="Through Hole", PackageDescription="Male Header, Pitch 2 mm, 1 x 2 Position, Height 4.8 mm, Tail Length 3.4 mm", PackageReference=S2B-PH-K-S, Packaging=Bulk, Pins=2, Radiation Hardening=No, REACH SVHC="No SVHC", RoHSCompliant=true, Voltage Rating (DC)="50 V"
PTH1 PTH2 PTH3 PTH4 PTH5 PTH6: library part CMP-00028-00004-2, "M2 PTH (2.5mm), 5mm pad", Pins=1
Q1: "PXP8R3-20QX - 20 V, P-channel Trench MOSFET", Manufacturer=Nexperia, Category=Uncategorized, Manufacturer Part Number=PXP8R3-20QXJ, Pricing 1="1=0.70830, 10=0.62250, 25=0.61630, 50=0.61020, 100=0.46530, 250=0.46060, 500=0.34520, 1000=0.29630 (USD)", RoHS=No, Stock 1=1756, Supplier 1="Arrow Electronics", Supplier Part Number 1=PXP8R3-20QXJ
R1 R2 R3: library part CMP-2000-00703-2, "RES SMD 1K OHM 5% 1/10W 0603", Manufacturer=Panasonic, Package=ERJ3G, Power Rating=0.1W, Resistance=1000Ω, Temperature="-55°C to +155°C", Temperature Coefficient=200ppm/°C, Temperature Range High=+155°C, Temperature Range Low=-55°C, Tolerance=5%, Voltage="75 V", Voltage Rating=75V, Automotive=Yes, Automotive Grade="Grade 0", Category=Res, ComponentLink2Description=Datasheet, ComponentLink2URL=https://industrial.panasonic.com/cdbs/www-data/pdf/RDA0000/AOA0000C301.pdf, Composition="Thick Film", Device Class L1="Passive Components", Device Class L2=Resistors, Device Class L3="Chip SMD Resistors", Digikey Description="RES SMD 1K OHM 5% 1/10W 0603", Footprint Url=https://industrial.panasonic.com/cdbs/www-data/pdf/RDA0000/DMA0000COL17.pdf, Height=0.55mm, Ipc Land Pattern Name=RESC16080X45, Lead Free=Yes, Manufacturer Part Number=ERJ-3GEYJ102V, Mounting Type="surface mount", Mouser Description="Res Thick Film 0603 1K Ohm 5% 1/10W ±200ppm/°C Molded SMD Punched Carrier T/R", Octopart=https://octopart.com/erj-3geyj102v-panasonic-55403670, RoHS=TRUE, Series=ERJ
R4 R5 R6 R12: library part CMP-2000-00803-1, Manufacturer=Panasonic, Part Number=ERJ-3GEYJ512V
R7: "35W Series 3 mm Open Frame 100 kOhm ±25 % Single-Turn Trimming Potentiometer", Insulation Resistance=100MR, Manufacturer="TT BI", Max Operating Temperature=125°C, Min Operating Temperature=-40°C, Package Quantity=2000, Power Rating=100mW, Resistance=100kR, Resistance Tolerance=25%, Resistor Type=Cermet, Supplier Part Number 1=74M7115, Temperature Coefficient=250ppm/°C, Voltage Rating=50V, Category="Variable Resistors and Potentiometers", ComponentLink1Description=https://datasheet.ciiva.com/22715/4701-22715101.pdf?src-supplier=Element14, ComponentLink1URL=https://datasheet.ciiva.com/22715/4701-22715101.pdf?src-supplier=Element14, ComponentLink2Description=https://datasheet.ciiva.com/7634/4701-7634922.pdf?src-supplier=Element14, ComponentLink2URL=https://datasheet.ciiva.com/7634/4701-7634922.pdf?src-supplier=Element14, Lead Free="Lead Free", Manufacturer Part Number=35WR100KLFTR, Number of Turns=1, Packaging="Tape and Reel", Pricing 1="1=0.35800, 10=0.34100, 25=0.32400, 50=0.30100, 100=0.28500, 250=0.27700, 500=0.24900, 1000=0.23800 (USD)", REACH SVHC="No SVHC", RoHS=Yes, RoHS Compliant=Yes, Series=37, Stock 1=19940, Supplier 1=Newark, Termination=Solder, Tolerance=25%, Type=Potentiometer, Voltage Rating (DC)=50V, Width=1.55mm
R8 R9: library part CMP-2000-00704-2, "RES SMD 10K OHM 5% 1/10W 0603", Case Code (Imperial)=0603, Case Code (Metric)=1608, Max Operating Temperature=155°C, Max Power Dissipation=100mW, Min Operating Temperature=-55°C, Package Quantity=1, Resistance=10kR, Resistance Tolerance=5%, Resistor Type="Thick Film", Temperature Coefficient=200ppm/°C, Voltage Rating=75V, Voltage Rating (DC)=50V, Case/Package=0603, Construction=Rectangular, Contact Plating=Tin, Depth=0.8mm, Features="Automotive AEC-Q200", Height=0.45mm, Lead Free="Lead Free", Length=1.6mm, Military Standard=Not, Mount="Surface Mount", Number of Terminations=2, Packaging="Tape and Reel", Power Rating=100mW, REACH SVHC="No SVHC", RoHS Compliant=Yes, Series=ERJ, Technology="THICK FILM", Termination=SMD/SMT, Tolerance=5%, Weight=7.1E-05oz, Width=0.8mm, Working Voltage=75V
R10: library part CMP-2000-00702-1, Manufacturer=Panasonic, Part Number=ERJ-3GEYJ101V
R11 R13: library part CMP-2000-00705-1, Manufacturer=Panasonic, Part Number=ERJ-3GEYJ104V
S1 S2 S3 S4 S5 S6 S7 S8 S9 S10 S11 S12 S13 S14 S15 S16 S17 S18 S19 S20 S21 S22 S23 S24 S25 S26 S27 S28 S29 S30: "Cherry MX Brown With Fixation Pins"
S31: "Rotary Encoder", Supplier Part Number 1=987-1196-ND, Supplier 1=Digi-Key
S32: "Switch Tactile OFF (ON) SPST Round Button PC Pins 0.05A 12VDC 100000Cycles 1N Thru-Hole Bag", Manufacturer="CUI Devices", Manufacturer Part Number=TS02-66-43-BK-100-SCR-D, Pricing 1="1=0.09100, 25=0.08560, 100=0.07670, 250=0.07150, 500=0.06460, 1000=0.05270, 2000=0.05130, 5000=0.04740 (USD)", RoHS=No, Stock 1=6000, Supplier 1="Arrow Electronics", Supplier Part Number 1=TS02-66-43-BK-100-SCR-D
S33: "Switch Slide N.O./N.C. SPDT Raised Slide 0.1A 24VDC Gull Wing SMD Bulk", Case/Package=SMD/SMT, Manufacturer=CUI, Manufacturer Part Number=DS01-254-L-01BE, Max Operating Temperature=85°C, Max Voltage Rating (DC)=24V, Min Operating Temperature=-40°C, Category="DIP Switches", ComponentLink1Description=https://www.nidec-copal-electronics.com/e/catalog/switch/cjs.pdf?src-supplier=Digi-Key, ComponentLink1URL=https://www.nidec-copal-electronics.com/e/catalog/switch/cjs.pdf?src-supplier=Digi-Key, ComponentLink2Description=http://www.nidec-copal-electronics.com/e/product/files/file/b1d651d581b7f6382a1a6c96f0c036e447720c59.pdf?src-supplier=Avnet, ComponentLink2URL=http://www.nidec-copal-electronics.com/e/product/files/file/b1d651d581b7f6382a1a6c96f0c036e447720c59.pdf?src-supplier=Avnet, Contact Material="Copper Alloy", Contact Plating=Gold, Lead Free="Lead Free", Mount="Surface Mount", Packaging=Bulk, Pricing 2="1=0.73000, 10=0.64700, 20=0.63300, 50=0.63300, 100=0.63200, 200=0.56100, 500=0.53500, 1000=0.51700, 2000=0.49800, 10000=0.49800 (USD)", Radiation Hardening=No, RoHS=Yes, RoHS Compliant=Yes, Stock 2=600, Supplier 1=Mouser, Supplier 2=Mouser, Supplier Part Number 2=229-CJS-1200B1, Termination="Gull Wing", Throw Configuration=SPDT
S34: "Switch Slide ON ON SPDT Side Slide 1A 30VDC 20000Cycles PC Pins Thru-Hole", Contact Current Rating=4A, Current Rating=1A, Manufacturer=APEM, Max Operating Temperature=85°C, Max Voltage Rating (AC)=250V, Max Voltage Rating (DC)=30V, Min Operating Temperature=-40°C, Package Quantity=100, Supplier Part Number 1=82Y7730, Voltage Rating (AC)=125V, Actuator Length=6mm, Actuator Material=Nylon,Glass,Polyamide, Actuator Type=Standard, Category="Slide Switches", ComponentLink1Description=https://datasheet.ciiva.com/22638/1686052-22638216.pdf?src-supplier=Element14, ComponentLink1URL=https://datasheet.ciiva.com/22638/1686052-22638216.pdf?src-supplier=Element14, Contact Material=Silver, Contact Plating=Silver, Depth=13.5mm, Electrical Life=10000Cycles, Illumination Type=Non-Illuminated, Length=14.1mm, Manufacturer Part Number=25336NA6, Max Current Rating=1A, Mechanical Life=20000Cycles, Mount="Through Hole", Orientation="Right Angle", Packaging=Bulk, Pricing 1="1=4.37000, 10=3.91000, 25=3.70000, 50=3.57000, 100=3.38000, 250=3.13000 (USD)", REACH SVHC="No SVHC", RoHS=Yes, RoHS Compliant=Yes, Stock 1=209, Supplier 1=Newark, Switch Function=On-On, Switch Travel=4mm, Termination="PC Pins", Throw Configuration=SPDT, Voltage Rating (DC)=30V
U1: "MCU 32-Bit ARM Cortex-M0 RISC 64KB Flash 2V to 3.6V 64-Pin LQFP Tray", Case/Package=LQFP, Frequency=48MHz, Manufacturer=STMicroelectronics, Max Operating Temperature=105°C, Min Operating Temperature=-40°C, Category=Microcontrollers, ComponentLink1Description=http://www.st.com/content/ccc/resource/technical/document/datasheet/cd/46/43/83/22/d3/40/c8/DM00090510.pdf/files/DM00090510.pdf/jcr:content/translations/en.DM00090510.pdf?src-supplier=Digi-Key, ComponentLink1URL=http://www.st.com/content/ccc/resource/technical/document/datasheet/cd/46/43/83/22/d3/40/c8/DM00090510.pdf/files/DM00090510.pdf/jcr:content/translations/en.DM00090510.pdf?src-supplier=Digi-Key, Core Architecture=ARM, Interface=I2C,SPI,USB,HDMI,IrDA,UART,USART, Manufacturer Part Number=STM32F072RBT7, Memory Size=128KB, Memory Type=FLASH, Number of I/Os=51, Oscillator Type=Internal, Packaging=Tray, Peripherals=POR,PWM,WDT,DMA, Pricing 1="1=7.63000, 10=6.86000, 25=6.49000, 50=6.05000, 100=5.62000, 250=5.10000, 500=4.79000 (USD)", RoHS=Yes, Stock 1=885, Supplier 1=Newark
U2: Manufacturer="Espressif Systems", Supplier Part Number 1=1965-ESP32-C3-WROOM-02-N4CT-ND, Manufacturer Part Number=ESP32-C3-WROOM-02-N4, Pricing 1="1=1.95000 (USD)", RoHS=No, Stock 1=225, Supplier 1=Digi-Key
U3: "NOR Flash Serial (SPI, Dual SPI, Quad SPI) 2.5V/3V/3.3V 2M-bit 256K x 8 8ns 8-Pin SOIC N", Case/Package=SOIC, Frequency=104MHz, Manufacturer=ISSI, Max Operating Temperature=105°C, Max Supply Voltage=3.6V, Min Operating Temperature=-40°C, Min Supply Voltage=2.3V, Operating Supply Voltage=3.3V, Supplier Part Number 1=65AC5987, Access Time=8ns, Address Bus Width=24b, Category=Memory, ComponentLink1Description=http://www.mouser.com/ds/2/198/25LQ025B-512B-010B-020B-040B-706473.pdf?src-supplier=Mouser, ComponentLink1URL=http://www.mouser.com/ds/2/198/25LQ025B-512B-010B-020B-040B-706473.pdf?src-supplier=Mouser, ComponentLink2Description=http://www.issi.com/WW/pdf/25LQ025B-512B-010B-020B-040B.pdf?src-supplier=Avnet, ComponentLink2URL=http://www.issi.com/WW/pdf/25LQ025B-512B-010B-020B-040B.pdf?src-supplier=Avnet, ComponentLink3Description=http://www.issi.com/WW/pdf/25LQ025B-512B-010B-020B-040B.pdf?src-supplier=Digi-Key, ComponentLink3URL=http://www.issi.com/WW/pdf/25LQ025B-512B-010B-020B-040B.pdf?src-supplier=Digi-Key, ComponentLink4Description=http://www.farnell.com/datasheets/2625712.pdf?src-supplier=Newark, ComponentLink4URL=http://www.farnell.com/datasheets/2625712.pdf?src-supplier=Newark, Density=2Mb, Interface=SPI,Serial, Manufacturer Part Number=IS25LQ020B-JNLE, Memory Type=FLASH,NOR, Mount="Surface Mount", Number of Pins=8, Packaging=Bulk, Page Size=256B, Pricing 1="1=0.45200, 10=0.41800, 100=0.37600, 500=0.35200 (USD)", RoHS=Yes, RoHS Compliant=Yes, Stock 1=799, Supplier 1=Newark
U4: library part CMP-0133-00143-2, "IC CONTROLLR LI-ION 4.2V SOT23-5", Case/Package=SOT-23, Drain to Source Resistance=350mR, Max Charge Current=500mA, Max Input Voltage=6V, Max Operating Temperature=85°C, Max Output Voltage=4.5V, Max Power Dissipation=1.54W, Min Operating Temperature=-40°C, Min Output Voltage=4.168V, Min Supply Voltage=3.75V, Output Voltage=4.2V, Voltage Rating=4.534V, Contact Plating=Tin, Height=0.051inch, Lead Free="Lead Free", Length=0.122inch, Max Supply Voltage=6V, Mount="Surface Mount", Number of Cells=1, Number of Channels=1, Number of Outputs=1, Number of Pins=5, Output Current=500mA, Packaging="Tape and Reel", Radiation Hardening=No, REACH SVHC="No SVHC", Termination=SMD/SMT, Weight=0.00709oz, Width=0.071inch
U5: "LDO Regulator Pos 3.3V 1A 8-Pin SOIC T/R", Case/Package=SOIC, Dropout Voltage=450mV, Manufacturer=Diodes, Max Operating Temperature=85°C, Min Operating Temperature=-40°C, Output Current=1A, Output Voltage=3.3V, Category="Voltage Regulators - Linear", ComponentLink1Description=http://www.mouser.com/ds/2/115/AP2115-464923.pdf?src-supplier=Mouser, ComponentLink1URL=http://www.mouser.com/ds/2/115/AP2115-464923.pdf?src-supplier=Mouser, ComponentLink2Description=https://www.diodes.com/assets/Datasheets/AP2115.pdf?src-supplier=Digi-Key, ComponentLink2URL=https://www.diodes.com/assets/Datasheets/AP2115.pdf?src-supplier=Digi-Key, Manufacturer Part Number=AP2115M-3.3TRG1, Mount="Surface Mount", Number of Regulators=1, Packaging="Tape and Reel", Pricing 1="1=0.39860, 10=0.32620, 25=0.30340, 100=0.20830, 250=0.19280, 500=0.15840, 1000=0.11820, 3000=0.11710 (USD)", RoHS=Yes, RoHS Compliant=Yes, Stock 1=3960, Supplier 1="Arrow Electronics", Supplier Part Number 1=AP2115M-3.3TRG1

## Via types
v1: diameter 19.68, hole 11.81, Top Layer to Bottom Layer, 175 vias
v2: diameter 31.5, hole 19.68, Top Layer to Bottom Layer, 5 vias

## Nets (pads, with @x,y where several pads share a name; then routed paths per layer and width w, separated by ;. In a path a pad name is that pad's centre, name@x,y a point inside that pad or via, vN(x,y) a via of type N, cw(c..) or ccw(c..) an arc to the next point about the centre after c; other vN are vias at no path point)
3.3V: C1.2 C2.2 C3.1 C4.1 C5.1 C6.2 C7.2 C8.1 C14.1 C15.1 C16.2 C17.2 C22.1 J2.5 J2.7 J2.14 J2.15 J3.1 R8.2 S33.1 U1.13 U1.32 U1.48 U2.1 U3.8 U5.1 | length 7112.6
  Top Layer w5: v2(1860,4800) 1800.1,4859.9 1800.1,4965.79 1806.18,4971.87 1946.07,4971.87 2018.64,4899.3 2018.64,4872.82 J2.15@2022.05,4869.41 J2.14@2041.73,4869.41 ; 1910,5790 U1.48@1920.95,5790 ; 2150,5290 2157.16,5297.16 ; 2156.99,5295.23 2157.16,5295.41 2157.16,5297.16 ; U1.13@2157.16,5337.24 2157.16,5297.16 ; 2179.27,4800 2179.53,4800.26 J2.7@2179.53,4869.41 ; J2.5@2218.9,4869.41 2218.9,4800.42 2219.32,4800 ; U1.32@2294.96,5711.26 2296.59,5711.26 2300,5714.67 2300,5740 ; U2.1@3397.28,6038.07 3399.21,6040 v1(3490,6040)
  Top Layer w15: v1(2450,6060) S33.1@2450,6117.8
  Top Layer w30: v2(1860,4800) 2179.27,4800 2219.32,4800 2370,4800 v2(2430,4860) ; v2(1880,5790) 1910,5790 ; v1(2140,5240) 2140,5248.65 2157.16,5265.81 2157.16,5295.05 2156.99,5295.23 ; 2300,5740 v1(2300,5750) ; S33.1@2450,6117.8 S33.1@2452.2,6120 ; J3.1@3060,6059.88 3059.57,6059.45 3059.57,5999.57 v1(3000,5940) 3241.96,5940 3340.03,6038.07 U2.1@3397.28,6038.07
  Bottom Layer w5: R8.2@3490,5865.62 v1(3490,6040)
  Bottom Layer w15: U5.1@1342.36,5575 1342.36,5637.89 1349.79,5645.32 C22.1@1350,5645.32 ; v1(2450,6060) 2450,5850 2449.68,5849.69 C8.1@2514.26,5785.11
  Bottom Layer w20: 2431.38,4920 2432.04,4920
  Bottom Layer w30: U5.1@1342.36,5575 1536.25,5575 1561.88,5600.63 C3.1@1580,5600.63 ; U3.8@1490,5310 1497.5,5310 1580.94,5393.44 ; C3.1@1580.94,5600.63 1580.94,5393.44 ; C3.1@1580.94,5601.26 1606.57,5601.26 1607.2,5600.63 1658.03,5651.46 C1.2@1660,5651.46 1660.73,5652.19 1729.27,5652.19 C2.2@1730,5652.91 1731.97,5652.91 1747.48,5668.43 1760.14,5668.43 1773.54,5681.82 1773.54,5753.54 1810,5790 v2(1880,5790) ; v2(1860,4800) 1580.94,5079.06 1580.94,5110 ; v1(2140,5240) 2130,5250 2071.43,5250 2016.89,5195.46 2016.89,5182.48 2005.32,5170.91 C4.1@2005.32,5170 C5.1@1910,5170 1823.09,5170 1763.09,5110 1580.94,5110 ; v1(2300,5750) 2308.54,5758.54 C6.2@2360,5758.54 C7.2@2450,5758.54 2453.7,5762.24 2504.76,5762.24 C8.1@2511.88,5769.37 ; v2(2430,4860) 2430,5306.62 2592.99,5469.61 2592.99,5716.3 C8.1@2539.92,5769.37 ; C8.1@2514.26,5783.23 C8.1@2514.26,5785.11 ; C8.1@2530,5769.37 C8.1@2539.92,5769.37 ; C16.2@3300,5938.62 C16.2@3300,5938.62 3220.04,5938.58 C17.2@3220,5938.54 3218.54,5940 v1(3000,5940) 2710.63,5940 2540,5769.37 C8.1@2539.92,5769.37 ; 1580.94,5110 1580.94,5393.44